# Altium PCB final_sensor_pcb_v3.PcbDoc (part 2 of 3)
Units mm, origin at the board's own origin, x right, y up, seen from the top; angles counter-clockwise.
Board outline 108.2 x 22.22 mm, 2 copper layers (Top Layer, Bottom Layer); 94 components, 57 nets, 253 pads, 98 vias.
Unrouted connection lines stored in the file: 1.
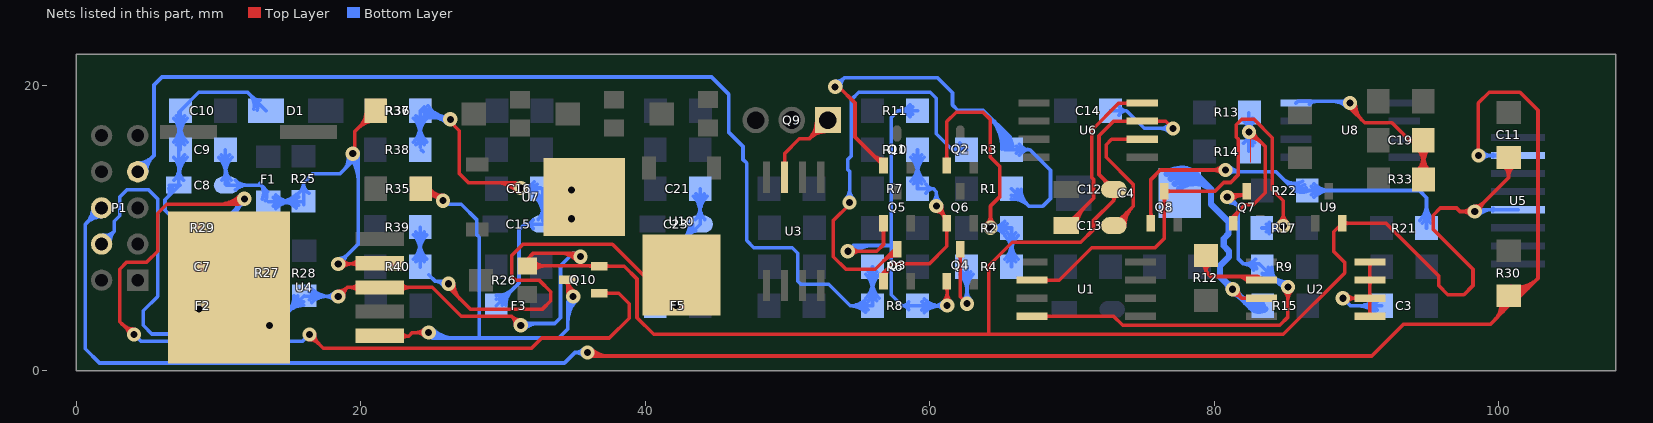
[diagram p2: the nets of this part, all layers, seen from the top]

## Via types
v1: diameter 1, hole 0.5, Top Layer to Bottom Layer, 98 vias

## Nets (pads, with @x,y where several pads share a name; then routed paths per layer and width w, separated by ;. In a path a pad name is that pad's centre, name@x,y a point inside that pad or via, vN(x,y) a via of type N, cw(c..) or ccw(c..) an arc to the next point about the centre after c; other vN are vias at no path point) (continued)
HGND: C7.1 C8.2 C9.1 C10.1 C11.1 C12.1 C14.1 D1.1 F2.2 Q10.2 R26.3 R28.1 R29.1 U4.3 U5.4 U6.3 U9.2 | length 274.9
  Top Layer w0.254: v1(18.415,5.207) 19.05,5.842 ; v1@18.416,5.58 ccw(c18.418,6.474) 19.05,5.842 ; v1@18.788,5.208 cw(c19.682,5.21) 19.05,5.842 ; U4.3@19.872,5.578 ccw(c19.236,4.942) 19.236,5.842 ccw(c19.236,6.742) U4.3@19.872,6.106 ; U4.3@22.8,5.578 cw(c23.436,4.942) 23.436,5.842 cw(c23.436,6.742) U4.3@22.8,6.106 ; v1@30.869,3.176 ccw(c29.975,3.178) 30.607,3.81 ; v1@31.241,3.548 cw(c31.239,4.442) 30.607,3.81 ; v1(31.242,3.175) 31.242,3.302 31.115,3.429 31.115,3.302 30.607,3.81 ; R26.3@31.699,7.35 31.699,7.823 32.131,8.255 35.56,8.255 35.433,8.128 v1(35.433,8.001) ; R26.3@31.75,7.366 Q10.2@36.749,7.35 ; R26.3@32.132,7.014 cw(c32.975,6.166) 32.979,7.362 ; R26.3@32.135,7.683 ccw(c32.906,8.45) 32.903,7.362 ; 33.919,8.255 cw(c33.919,6.487) v1@35.169,7.737 ; 34.533,8.255 cw(c34.533,7.101) v1@35.349,7.917 ; 36.028,7.352 cw(c36.026,6.867) Q10.2@36.37,7.209 ; 36.123,7.352 ccw(c36.124,7.702) Q10.2@36.371,7.454 ; Q10.2@36.768,7.331 38.516,7.331 39.414,6.433 39.414,3.706 40.58,2.54 84.836,2.54 89.154,6.858 89.154,7.596 88.392,8.358 88.392,9.749 U9.2@88.992,10.349 92.057,10.349 95.758,6.648 95.758,5.969 96.393,5.334 97.536,5.334 98.171,5.969 98.171,7.112 95.377,9.906 95.377,10.922 95.877,11.422 97.012,11.422 97.258,11.176 v1(98.298,11.176) 100.686,13.564 ; Q10.2@37.165,7.209 cw(c37.461,6.913) 37.461,7.331 cw(c37.461,7.749) Q10.2@37.165,7.453 ; 64.135,2.54 64.135,7.366 65.786,9.017 70.612,9.017 71.501,9.906 71.501,10.541 72.934,11.974 ; 72.122,13.538 cw(c71.405,12.821) C12.1@72.416,12.742 ; 72.339,13.321 ccw(c72.634,13.616) C12.1@72.634,13.198 ; C12.1@72.73,12.299 cw(c72.575,11.974) 72.934,11.974 ; C12.1@73.139,12.299 ccw(c73.294,11.974) 72.934,11.974 ; U6.3@73.993,17.439 ccw(c73.783,17.229) 73.783,17.526 ccw(c73.783,17.823) U6.3@73.993,17.613 ; U6.3@75.867,17.439 cw(c76.077,17.229) 76.077,17.526 cw(c76.077,17.823) U6.3@75.867,17.613 ; v1(77.089,17.018) 76.581,17.526 U6.3@74.93,17.526 72.898,17.526 71.882,16.51 71.882,13.778 C12.1@72.934,12.725 72.934,11.974 ; 88.669,10.026 cw(c88.981,9.715) U9.2@88.995,10.155 ; U9.2@89.114,10.227 cw(c89.41,9.931) 89.41,10.349 cw(c89.41,10.767) U9.2@89.114,10.471 ; v1@98.034,10.912 ccw(c97.398,10.276) 97.398,11.176 ccw(c97.398,12.076) v1@98.034,11.44 ; v1@98.298,11.549 ccw(c98.298,12.449) 98.935,11.813 ccw(c99.571,11.176) v1@98.671,11.176 ; C11.1@100.262,14.451 cw(c99.545,13.564) 100.686,13.564 ; C11.1@100.422,14.648 cw(c99.975,14.096) 100.686,14.096 cw(c101.396,14.096) C11.1@100.949,14.648 ; C11.1@100.494,14.329 cw(c100.417,14.072) 100.686,14.072 ; C11.1@100.877,14.329 ccw(c100.954,14.072) 100.686,14.072 ; C11.1@101.109,14.451 ccw(c101.827,13.564) 100.686,13.564 ; 19.05,5.842 U4.3@21.336,5.842 25.019,5.842 27.051,3.81 30.607,3.81 ; 100.686,13.564 C11.1@100.686,14.974 100.686,14.072
  Bottom Layer w0.254: 6.407,12.178 ccw(c6.044,12.541) C8.2@6.491,12.794 ; C8.2@6.549,13.026 C8.2@7.203,13.026 ; 6.644,12.415 ccw(c6.346,12.712) C8.2@6.712,12.919 ; C7.1@6.814,6.764 cw(c5.636,5.586) 7.302,5.586 ; C7.1@6.814,7.816 ccw(c5.598,9.031) 7.317,9.031 ; F2.2@6.826,5.073 ccw(c5.677,6.221) 7.302,6.221 ccw(c8.927,6.221) F2.2@7.778,5.073 ; R29.1@6.842,9.507 cw(c5.693,8.358) 7.317,8.358 cw(c8.942,8.358) R29.1@7.793,9.507 ; C9.1@6.842,14.994 cw(c5.968,14.12) 7.203,14.12 ; C8.2@6.869,13.361 ccw(c6.061,14.168) 7.203,14.168 ccw(c8.345,14.168) C8.2@7.538,13.361 ; C7.1@6.994,6.944 cw(c6.249,6.199) 7.302,6.199 ; C7.1@6.994,7.636 ccw(c6.212,8.418) 7.317,8.418 ; F2.2@7.006,4.893 ccw(c6.29,5.608) 7.302,5.608 ccw(c8.313,5.608) F2.2@7.598,4.893 ; R29.1@7.021,9.687 cw(c6.306,8.972) 7.317,8.972 cw(c8.329,8.972) R29.1@7.614,9.687 ; C9.1@7.021,15.866 ccw(c6.306,16.581) 7.317,16.581 ccw(c8.329,16.581) 7.614,15.866 cw(c8.605,16.857) 7.203,16.857 ; C10.1@7.021,17.916 cw(c6.306,17.201) 7.317,17.201 cw(c8.329,17.201) 7.614,17.916 ccw(c8.605,16.925) 7.203,16.925 ; R29.1@7.136,10.033 R29.1@7.317,10.033 ; C8.2@7.183,12.954 6.231,12.002 6.231,11.272 7.317,10.186 R29.1@7.317,10.033 ; C8.2@7.203,13.569 cw(c9.218,13.569) C9.1@7.793,14.994 ; 7.203,14.182 cw(c8.605,14.182) C9.1@7.614,15.173 ; C9.1@7.203,16.312 cw(c9.218,16.312) 7.793,17.737 ccw(c8.942,16.588) 7.317,16.588 ccw(c5.693,16.588) 6.842,17.737 cw(c5.968,16.864) 7.203,16.864 ; 7.203,16.919 cw(c5.968,16.919) 6.842,16.045 ccw(c5.693,17.194) 7.317,17.194 ccw(c8.942,17.194) 7.793,16.045 cw(c9.218,17.47) C10.1@7.203,17.47 ; C7.1@7.29,7.29 7.302,7.278 F2.2@7.302,4.547 ; 7.302,5.644 cw(c8.886,5.644) C7.1@7.766,6.764 ; 7.302,6.257 cw(c8.272,6.257) C7.1@7.586,6.944 ; C8.2@7.311,13.026 C8.2@7.203,13.026 ; C7.1@7.317,7.438 R29.1@7.317,10.033 ; 7.317,8.285 ccw(c8.235,8.285) C7.1@7.586,7.636 ; 7.317,8.898 ccw(c8.848,8.898) C7.1@7.766,7.816 ; C9.1@7.317,15.519 C10.1@7.317,18.263 ; F2.2@7.531,4.318 F2.2@7.302,4.547 ; F2.2@7.865,4.547 cw(c7.865,3.637) v1@8.547,4.239 ; F2.2@7.9,4.238 cw(c8.407,3.975) v1@8.407,4.547 ; F2.2@7.9,4.856 ccw(c8.407,5.118) v1@8.407,4.547 ; v1@8.356,4.071 ccw(c7.302,3.14) F2.2@7.302,4.547 ; v1(8.636,4.318) v1@8.407,4.547 ; 12.167,19.431 cw(c11.351,18.615) D1.1@12.477,18.365 ; 12.384,19.214 ccw(c12.935,19.765) D1.1@12.935,18.986 ; D1.1@12.494,19.104 cw(c11.886,18.496) D1.1@12.725,18.309 ; D1.1@13.335,18.263 12.04,19.558 8.613,19.558 C10.1@7.317,18.263 ; v1(13.589,3.175) 13.945,3.175 R28.1@16.027,5.258 ; v1@13.589,3.294 ccw(c13.589,4.44) 14.399,3.63 ; v1@13.589,3.548 ccw(c13.589,5.307) 14.833,4.063 ; 14.793,4.024 ccw(c13.559,5.258) R28.1@15.304,5.258 ; 14.914,4.144 cw(c15.977,3.081) R28.1@15.977,4.585 ; 15.227,4.457 ccw(c14.426,5.258) R28.1@15.558,5.258 ; R28.1@15.347,4.578 cw(c15.977,3.948) R28.1@15.977,4.839 ; R28.1@16.002,5.207 v1(18.415,5.207) ; R28.1@16.374,4.962 cw(c16.966,4.369) 16.966,5.207 ; R28.1@16.374,5.554 ccw(c17.212,6.392) 17.212,5.207 ; R28.1@16.553,4.782 cw(c17.579,3.756) 17.579,5.207 ; R28.1@16.553,5.734 ccw(c17.825,7.005) 17.825,5.207 ; v1@18.151,4.943 ccw(c17.515,4.307) 17.515,5.207 ccw(c17.515,6.107) v1@18.151,5.471 ; v1(31.242,3.175) 31.242,3.302 33.622,3.302 34.036,3.716 34.036,7.366 34.925,8.255 35.56,8.255 35.433,8.128 v1(35.433,8.001) ; v1@31.326,3.091 cw(c31.836,2.581) 31.836,3.302 cw(c31.836,3.769) v1@31.506,3.439 ; v1@31.506,2.911 cw(c32.449,1.968) 32.449,3.302 ; C14.1@72.695,18.263 73.812,18.263 ; C14.1@73.29,17.948 cw(c73.812,17.671) 73.812,18.263 ; C14.1@73.29,18.577 ccw(c73.812,18.854) 73.812,18.263 ; v1@76.825,16.754 ccw(c76.189,16.118) 76.189,17.018 ccw(c76.189,17.918) v1@76.825,17.282 ; v1(77.089,17.018) 75.057,17.018 73.812,18.263 ; v1@98.298,11.303 U5.4@101.346,11.303 ; v1@98.382,11.092 cw(c98.892,10.582) 98.892,11.303 cw(c98.892,11.77) v1@98.562,11.44 ; v1@98.562,10.912 cw(c99.505,9.969) U5.4@99.505,11.303 ; U5.4@99.604,11.216 ccw(c99.394,11.006) 99.394,11.303 ccw(c99.394,11.6) U5.4@99.604,11.39 ; C8.2@7.203,13.026 7.203,18.148 C10.1@7.317,18.263 ; F2.2@7.302,4.547 v1@8.407,4.547
HMC_E\N\: P1.4 R27.2 | length 37.1
  Bottom Layer w0.254: P1.4@1.778,8.89 2.667,9.779 ; P1.4@1.862,9.507 ccw(c1.99,10.456) 2.667,9.779 ; P1.4@2.395,8.974 cw(c3.344,9.102) 2.667,9.779 ; 5.715,11.049 5.715,5.207 4.699,4.191 4.699,3.175 5.311,2.563 11.58,2.563 13.437,4.42 R27.2@13.437,5.295 ; 5.723,11.062 5.723,12.057 5.08,12.7 3.556,12.7 3.048,12.192 3.048,10.878 2.667,10.497 2.667,9.779 ; 12.043,3.026 ccw(c10.311,4.758) R27.2@12.724,5.179 ; 12.389,3.372 ccw(c10.9,4.86) R27.2@12.974,5.223 ; 12.734,3.717 ccw(c11.488,4.963) R27.2@13.224,5.267 ; 13.08,4.063 ccw(c12.076,5.066) R27.2@13.474,5.311 ; 13.425,4.408 ccw(c12.665,5.169) R27.2@13.724,5.354
IN_RESET: Q7.3 R9.1 U1.4 | length 46.6
  Top Layer w0.254: U1.4@67.183,3.81 68.961,3.81 72.91,3.81 73.545,3.175 82.05,3.175 82.054,3.179 84.586,3.179 85.166,3.759 v1(85.166,5.866) ; U1.4@68.12,3.723 cw(c68.33,3.513) 68.33,3.81 cw(c68.33,4.107) U1.4@68.12,3.897 ; v1@80.518,12.192 80.671,12.345 Q7.3@82.263,12.345 ; v1@80.983,12.108 cw(c81.556,11.535) 81.556,12.345 ; v1@81.163,11.928 cw(c82.169,10.922) Q7.3@82.169,12.345 ; v1@81.163,12.456 ccw(c81.43,12.723) 81.43,12.345 ; 81.795,12.345 cw(c81.795,11.856) Q7.3@82.141,12.202 ; 81.897,12.345 ccw(c81.897,12.691) Q7.3@82.141,12.446 ; v1@84.902,5.602 cw(c84.265,4.965) 85.166,4.965 cw(c86.066,4.965) v1@85.43,5.602
  Bottom Layer w0.254: v1@80.772,12.192 81.026,12.192 81.661,11.557 81.661,7.874 82.042,7.493 ; v1@80.909,11.819 cw(c80.938,10.707) 81.724,11.494 ; v1@81.272,12.192 ccw(c81.866,12.192) 81.446,11.772 ; 82.107,7.493 ccw(c82.107,8.594) R9.1@82.886,7.816 ; 82.448,7.493 cw(c82.448,6.896) R9.1@82.984,7.157 ; R9.1@82.756,7.046 ccw(c82.042,6.7) 82.042,7.493 ; R9.1@83.361,6.567 cw(c83.361,4.821) 84.596,6.055 ; R9.1@83.361,6.821 cw(c83.361,5.688) 84.162,6.489 ; R9.1@83.78,7.24 ccw(c84.671,7.24) R9.1@84.041,6.61 ; R9.1@83.88,6.772 ccw(c85.166,8.058) v1@85.166,6.239 ; R9.1@84.034,7.24 ccw(c85.538,7.24) 84.475,6.176 ; 84.313,6.338 ccw(c85.166,7.191) v1@85.166,5.985 ; v1(85.166,5.866) 85.015,5.715 84.936,5.715 R9.1@83.361,7.29 83.158,7.493 82.042,7.493
  other v1: 80.899,12.192
IN_SET: Q8.3 R17.1 U1.2 | length 42.7
  Top Layer w0.254: U1.2@67.183,6.35 69.088,6.35 71.374,8.636 75.819,8.636 76.485,9.302 Q8.3@76.485,12.599 80.036,12.599 80.653,13.216 81.137,13.216 81.661,13.74 81.661,16.28 81.542,16.399 81.542,17.28 81.915,17.653 82.78,17.653 84.074,16.359 84.074,12.7 84.836,11.938 v1(84.836,10.16) ; U1.2@68.12,6.263 cw(c68.33,6.053) 68.33,6.35 cw(c68.33,6.647) U1.2@68.12,6.437 ; Q8.3@76.363,12.202 cw(c76.067,11.906) 76.485,11.906 cw(c76.903,11.906) Q8.3@76.607,12.202 ; Q8.3@76.607,12.477 cw(c76.903,12.181) 76.903,12.599 cw(c76.903,13.017) Q8.3@76.607,12.721 ; v1@84.572,10.424 ccw(c83.936,11.06) 84.836,11.06 ccw(c85.736,11.06) v1@85.1,10.424
  Bottom Layer w0.254: R17.1@83.324,10.017 v1@84.693,10.017 ; R17.1@83.589,10.017 ccw(c83.589,11.407) v1@84.572,10.424 ; R17.1@83.656,9.761 cw(c84.176,9.36) 84.176,10.017 cw(c84.176,10.673) R17.1@83.656,10.272 ; R17.1@83.857,9.606 cw(c84.693,8.962) v1@84.693,10.017 ; R17.1@83.857,10.427 ccw(c84.693,11.071) v1@84.693,10.017 ; 84.202,10.017 ccw(c84.202,10.794) v1@84.752,10.244 ; 84.282,10.017 cw(c84.282,9.606) v1@84.572,9.896 ; v1(84.836,10.16) v1@84.693,10.017
MICRO_ADC: P1.6 R30.1 U5.7 | length 160.9
  Top Layer w0.254: v1@36.025,1.354 ccw(c36.841,2.17) 36.841,1.016 ; v1@36.068,1.27 36.322,1.016 91.059,1.016 93.281,3.238 99.377,3.238 100.546,4.407 R30.1@100.546,5.118 ; v1@36.205,1.534 ccw(c37.455,2.784) 37.455,1.016 ; v1(98.552,15.113) 98.552,18.796 99.314,19.558 101.473,19.558 102.743,18.288 102.743,6.477 ; 99.758,3.619 ccw(c98.882,4.495) R30.1@100.018,4.99 ; 100.022,3.883 ccw(c99.25,4.655) R30.1@100.251,5.091 ; R30.1@100.127,4.699 R30.1@100.546,5.118 ; 100.286,4.147 ccw(c99.617,4.815) R30.1@100.484,5.192 ; R30.1@100.39,4.631 cw(c100.3,4.402) 100.546,4.402 cw(c100.734,4.402) R30.1@100.713,4.589 ; 100.55,4.411 ccw(c99.985,4.975) R30.1@100.717,5.293 ; R30.1@100.718,5.171 ccw(c100.946,6.276) 101.744,5.478 ; R30.1@100.769,5.419 ccw(c101.06,6.828) 102.077,5.811 ; R30.1@100.82,5.668 ccw(c101.174,7.38) 102.41,6.144 ; R30.1@100.872,5.917 ccw(c101.288,7.932) 102.743,6.477 ; R30.1@100.546,5.118 R30.1@100.686,5.258 101.524,5.258 102.743,6.477
  Bottom Layer w0.254: P1.6@1.155,11.43 cw(c-0.349,11.43) 0.714,10.366 cw(c1.778,9.303) P1.6@1.778,10.807 ; P1.6@1.409,11.43 cw(c0.518,11.43) 1.148,10.8 cw(c1.778,10.17) P1.6@1.778,11.061 ; P1.6@1.778,11.43 0.635,10.287 0.635,1.524 1.628,0.531 34.309,0.531 35.048,1.27 ; v1@35.676,1.008 ccw(c35.048,0.388) 35.048,1.27 ; v1@35.676,1.532 cw(c35.048,2.152) 35.048,1.27 ; v1(35.941,1.27) 35.048,1.27 ; v1(98.552,15.113) U5.7@101.346,15.113 ; v1@98.816,14.849 cw(c99.452,14.213) 99.452,15.113 cw(c99.452,16.013) v1@98.816,15.377 ; U5.7@99.604,15.026 ccw(c99.394,14.816) 99.394,15.113 ccw(c99.394,15.41) U5.7@99.604,15.2
N_CURRENT: P1.7 R6.2 R8.2 | length 89.4
  Bottom Layer w0.254: P1.7@4.318,13.692 P1.7@4.318,13.97 5.461,15.113 5.461,20.066 6.025,20.63 44.648,20.63 45.847,19.431 45.847,16.764 46.863,15.748 46.863,14.835 47.117,14.581 47.117,9.144 47.625,8.636 50.316,8.636 50.711,8.241 50.711,6.282 50.934,6.059 52.893,6.059 54.405,4.547 ; P1.7@4.318,14.339 ccw(c4.318,15.23) 4.948,14.6 ccw(c5.578,13.97) P1.7@4.687,13.97 ; P1.7@4.318,14.593 ccw(c4.318,16.097) 5.382,15.034 ccw(c6.445,13.97) P1.7@4.941,13.97 ; R8.2@55.479,4.084 ccw(c54.406,3.069) 54.406,4.547 ; R8.2@55.479,5.009 cw(c54.406,6.024) 54.406,4.547 ; R8.2@55.492,5.072 ccw(c54.343,6.221) 55.968,6.221 ccw(c57.593,6.221) R8.2@56.444,5.072 ; R6.2@55.492,6.764 cw(c54.343,5.615) 55.968,5.615 cw(c57.593,5.615) R6.2@56.444,6.764 ; R8.2@55.664,4.259 ccw(c54.995,3.627) 54.995,4.547 ccw(c54.995,5.467) R8.2@55.664,4.834 ; R8.2@55.672,4.893 ccw(c54.956,5.608) 55.968,5.608 ccw(c56.98,5.608) R8.2@56.264,4.893 ; R6.2@55.672,6.944 cw(c54.957,6.228) 55.968,6.228 cw(c56.98,6.228) R6.2@56.264,6.944 ; R6.2@55.968,7.29 R8.2@55.968,4.547 54.405,4.547
NetC3_1: C3.1 U2.5 U2.6 U2.7 U2.8 | length 17.5
  Top Layer w0.254: v1(89.027,5.08) U2.6@90.928,5.08 ; v1@89.291,4.816 cw(c89.928,4.179) 89.928,5.08 cw(c89.927,5.98) v1@89.291,5.344 ; U2.6@89.991,4.993 ccw(c89.781,4.783) 89.781,5.08 ccw(c89.781,5.377) U2.6@89.991,5.167 ; U2.5@90.841,3.897 ccw(c90.631,4.107) 90.928,4.107 ccw(c91.225,4.107) U2.5@91.015,3.897 ; U2.6@90.841,4.993 cw(c90.631,4.783) 90.928,4.783 cw(c91.225,4.783) U2.6@91.015,4.993 ; U2.6@90.841,5.167 ccw(c90.631,5.377) 90.928,5.377 ccw(c91.225,5.377) U2.6@91.015,5.167 ; U2.7@90.841,6.263 cw(c90.631,6.053) 90.928,6.053 cw(c91.225,6.053) U2.7@91.015,6.263 ; U2.7@90.841,6.437 ccw(c90.631,6.647) 90.928,6.647 ccw(c91.225,6.647) U2.7@91.015,6.437 ; U2.8@90.841,7.533 cw(c90.631,7.323) 90.928,7.323 cw(c91.225,7.323) U2.8@91.015,7.533 ; U2.5@90.928,3.81 U2.6@90.928,5.08 ; U2.8@90.928,7.62 U2.7@90.928,6.35 U2.6@90.928,5.08
  Bottom Layer w0.254: v1(89.027,5.08) 89.56,4.547 C3.1@91.745,4.547 ; C3.1@91.269,4.071 ccw(c90.12,2.922) 90.12,4.547 ccw(c90.12,6.171) C3.1@91.269,5.022 ; C3.1@91.449,4.25 ccw(c90.733,3.535) 90.733,4.547 ccw(c90.733,5.558) C3.1@91.449,4.843
NetC4_1: C4.1 R15.2 U2.3 | length 33.2
  Top Layer w0.254: v1(81.28,5.715) 81.915,5.08 ; v1@81.281,5.342 cw(c81.283,4.448) 81.915,5.08 ; v1@81.653,5.714 ccw(c82.547,5.712) 81.915,5.08 ; U2.3@82.375,4.993 ccw(c82.165,4.783) 82.165,5.08 ccw(c82.165,5.377) U2.3@82.375,5.167 ; U2.3@83.312,5.08 81.915,5.08
  Bottom Layer w0.254: C4.1@78.823,13.506 C4.1@78.994,13.506
  Bottom Layer w0.45: C4.1@76.64,13.815 cw(c77.658,12.597) C4.1@78.78,13.719 ; C4.1@76.929,13.47 cw(c77.975,12.218) 79.128,13.371 ; C4.1@77.217,13.124 cw(c78.292,11.839) 79.476,13.023 ; C4.1@77.506,12.779 cw(c78.608,11.46) 79.824,12.675 ; C4.1@78.994,13.506 79.756,12.744 79.756,11.684 80.989,10.451 80.989,9.615 80.645,9.271 80.645,8.763 81.026,8.382 81.026,8.001 80.391,7.366 80.391,6.604 v1(81.28,5.715) 82.448,4.547 ; v1@81.005,5.715 ccw(c80.341,5.715) 80.811,6.184 ccw(c81.28,6.654) v1@81.28,5.99 ; v1@81.28,5.44 cw(c81.28,4.776) 81.749,5.246 cw(c82.219,5.715) v1@81.555,5.715 ; 81.781,5.214 ccw(c82.517,5.95) R15.2@83.086,5.078 ; 82.173,4.822 ccw(c82.827,5.476) R15.2@83.332,4.701 ; 82.565,4.43 ccw(c83.136,5.001) R15.2@83.578,4.324 ; R15.2@82.891,4.279 ccw(c82.448,4.046) 82.448,4.547 ; R15.2@82.891,4.814 cw(c82.448,5.047) 82.448,4.547 ; R15.2@83.4,4.547 82.448,4.547
NetC8_1: C8.1 C9.2 F1.1 R25.2 R36.2 U4.4 | length 63.9
  Top Layer w0.254: v1(18.415,7.493) 20.701,7.493 U4.4@20.828,7.62 ; v1@18.679,7.229 cw(c19.315,6.593) 19.315,7.493 cw(c19.315,8.393) v1@18.679,7.757 ; 19.117,7.493 ccw(c19.117,8.561) U4.4@19.872,7.806 ; 19.354,7.493 cw(c19.354,6.76) U4.4@19.872,7.278 ; v1@19.558,15.24 19.558,16.777 R36.2@21.043,18.263 ; 19.809,17.028 cw(c21.043,15.794) R36.2@21.043,17.54 ; 19.93,17.149 ccw(c18.866,18.213) R36.2@20.37,18.213 ; 20.243,17.462 cw(c21.043,16.661) R36.2@21.043,17.794 ; R36.2@20.363,17.583 ccw(c19.733,18.213) R36.2@20.624,18.213
  Bottom Layer w0.254: C9.2@10.004,14.994 cw(c8.856,13.845) 10.48,13.845 cw(c12.105,13.845) C9.2@10.956,14.994 ; C9.2@10.184,15.173 cw(c9.469,14.458) 10.48,14.458 cw(c11.492,14.458) C9.2@10.777,15.173 ; C8.1@10.222,13.361 ccw(c9.597,13.986) 10.48,13.986 ; C8.1@10.48,13.102 C9.2@10.48,15.519 ; 10.48,13.738 ccw(c11.267,13.738) C8.1@10.711,13.181 ; 10.48,14.351 ccw(c11.881,14.351) C8.1@10.89,13.361 ; C8.1@10.556,13.026 13.009,13.026 F1.1@13.462,12.573 ; C8.1@11.19,12.692 cw(c11.998,11.884) 11.998,13.026 cw(c11.998,14.168) C8.1@11.19,13.361 ; 12.889,13.146 cw(c12.22,12.478) F1.1@13.064,12.051 ; 13.137,12.898 cw(c12.549,12.311) F1.1@13.29,11.936 ; F1.1@13.487,11.862 R25.2@15.939,11.862 ; F1.1@13.834,11.566 cw(c14.549,10.85) 14.549,11.862 cw(c14.549,12.873) F1.1@13.834,12.158 ; F1.1@14.013,11.386 cw(c15.162,10.237) 15.162,11.862 cw(c15.162,13.487) F1.1@14.013,12.338 ; F1.1@14.212,11.862 ccw(c14.212,13.614) R25.2@15.451,12.375 ; 14.392,11.862 cw(c14.392,10.365) R25.2@15.451,11.423 ; 14.825,11.862 ccw(c14.825,13.001) R25.2@15.63,12.195 ; 15.005,11.862 cw(c15.005,10.978) R25.2@15.63,11.603 ; R25.2@15.594,12.453 ccw(c15.09,13.183) 15.977,13.183 ; R25.2@15.977,11.659 R25.2@15.977,11.899 15.977,13.183 ; R25.2@16.359,12.453 cw(c16.864,13.183) 15.977,13.183 ; v1(18.415,7.493) 19.812,8.89 v1@19.812,15.367 ; v1@18.415,7.866 ccw(c18.415,8.766) 19.052,8.13 ccw(c19.688,7.493) v1@18.788,7.493 ; 18.796,14.097 ccw(c18.038,14.855) v1@19.071,15.141 ; 19.104,14.405 ccw(c18.521,14.989) v1@19.316,15.208 ; v1@19.167,14.976 cw(c17.611,13.42) 19.812,13.42 ; v1@19.347,15.156 cw(c18.224,14.033) 19.812,14.033 ; 19.413,14.714 ccw(c19.004,15.122) v1@19.561,15.276 ; v1@19.526,15.335 cw(c18.837,14.646) 19.812,14.646 ; v1@19.748,15.05 18.542,13.843 16.637,13.843 15.977,13.183
  other v1: 19.431,15.24
NetC13_1: C13.1 U6.2 | length 13
  Top Layer w0.254: C13.1@72.934,10.185 74.295,11.546 74.295,13.081 72.39,14.986 72.39,15.875 72.771,16.256 U6.2@74.93,16.256 ; C13.1@73.234,10.658 ccw(c73.234,11.076) 73.53,10.781 ; C13.1@73.453,10.185 cw(c74.706,10.185) 73.82,11.071 ; C13.1@73.707,10.185 cw(c75.574,10.185) 74.254,11.505 ; U6.2@73.993,16.169 ccw(c73.783,15.959) 73.783,16.256 ccw(c73.783,16.553) U6.2@73.993,16.343
NetC13_2: C13.2 U6.4 | length 15.1
  Top Layer w0.254: C13.2@69.582,10.185 71.501,12.105 71.501,13.44 71.374,13.567 71.374,16.891 73.279,18.796 U6.4@74.93,18.796 ; C13.2@69.882,10.658 ccw(c69.882,11.076) C13.2@70.177,10.781 ; C13.2@70.101,10.185 cw(c71.354,10.185) 70.468,11.071 ; C13.2@70.355,10.185 cw(c72.221,10.185) 70.901,11.505 ; U6.4@73.993,18.709 ccw(c73.783,18.499) 73.783,18.796 ccw(c73.783,19.093) U6.4@73.993,18.883
NetC15_1: C15.1 C16.2 F3.1 R37.2 R38.2 U7.2 | length 75.4
  Top Layer w0.254: v1(26.289,17.653) 26.289,17.497 26.924,16.862 26.924,13.843 27.559,13.208 30.861,13.208 v1(31.242,12.827) ; 29.422,13.208 cw(c29.422,11.007) v1@30.978,12.563 ; 30.035,13.208 cw(c30.035,11.62) v1@31.158,12.743 ; 30.648,13.208 cw(c30.648,12.233) v1@31.337,12.922
  Bottom Layer w0.254: R38.2@23.693,16.045 ccw(c22.544,17.194) 24.169,17.194 ccw(c25.794,17.194) R38.2@24.645,16.045 ; R37.2@23.693,17.737 cw(c22.544,16.588) 24.169,16.588 cw(c25.794,16.588) R37.2@24.645,17.737 ; R38.2@23.873,15.866 ccw(c23.157,16.581) 24.169,16.581 ccw(c25.18,16.581) R38.2@24.465,15.866 ; R37.2@23.873,17.916 cw(c23.157,17.201) 24.169,17.201 cw(c25.18,17.201) R37.2@24.465,17.916 ; R38.2@24.169,15.709 R37.2@24.169,18.263 24.448,18.542 24.448,17.843 24.511,17.78 26.289,17.78 cw(c26.289,19.693) R37.2@24.721,18.598 ; R38.2@24.257,15.494 R38.2@24.384,15.367 ; R37.2@24.304,18.307 ccw(c25.315,19.013) 25.315,17.78 ; R37.2@24.512,18.452 ccw(c25.802,19.353) 25.802,17.78 ; 25.082,17.78 cw(c25.082,16.446) v1@26.025,17.389 ; v1@26.025,17.917 cw(c25.695,18.247) 25.695,17.78 cw(c25.695,17.059) v1@26.205,17.569 ; F3.1@29.515,4.547 31.115,6.147 31.115,9.906 31.492,10.283 ; F3.1@29.515,5.016 ccw(c29.515,6.148) 30.315,5.347 ; F3.1@29.515,5.27 ccw(c29.515,7.015) 30.749,5.781 ; F3.1@29.934,4.597 cw(c30.825,4.597) F3.1@30.195,5.227 ; F3.1@30.188,4.597 cw(c31.692,4.597) 30.628,5.66 ; v1@31.506,12.563 cw(c32.142,11.927) 32.142,12.827 cw(c32.142,13.727) v1@31.506,13.091 ; 31.794,12.827 cw(c31.794,12.047) C16.2@32.386,12.554 ; 31.795,12.827 ccw(c31.795,13.607) C16.2@32.387,13.099 ; C15.1@32.126,9.983 ccw(c31.492,9.464) 31.492,10.283 ; C15.1@32.126,10.583 cw(c31.492,11.102) 31.492,10.283 ; C16.2@32.193,12.389 ccw(c31.242,11.575) v1(31.242,12.827) ; C16.2@32.194,13.265 cw(c31.242,14.081) v1(31.242,12.827) ; C16.2@32.229,12.25 cw(c30.871,10.892) 32.791,10.892 ; C16.2@32.408,12.43 cw(c31.484,11.506) 32.791,11.506 ; C15.1@32.457,10.617 ccw(c31.649,11.425) 32.791,11.425 ccw(c33.933,11.425) C15.1@33.126,10.617 ; C15.1@32.791,10.283 31.492,10.283 ; 32.791,11.311 cw(c34.12,11.311) C16.2@33.181,12.25 ; 32.791,11.924 cw(c33.507,11.924) C16.2@33.001,12.43 ; C16.2@33.001,12.48 cw(c33.716,11.765) 33.716,12.776 cw(c33.716,13.788) C16.2@33.001,13.073 ; C16.2@33.181,12.3 cw(c34.33,11.152) 34.33,12.776 cw(c34.33,14.401) C16.2@33.181,13.252 ; C15.1@33.25,10.132 cw(c34.205,9.222) 34.205,10.541 ; C15.1@33.434,9.957 cw(c34.798,8.656) 34.798,10.541 32.791,10.541 32.791,12.69 C16.2@32.705,12.776 ; C15.1@33.591,10.541 ccw(c33.591,11.875) v1@34.534,10.932 ; 33.713,12.776 cw(c33.713,11.615) v1@34.534,12.436 ; 34.082,12.776 ccw(c34.082,13.416) v1@34.534,12.964 ; v1@34.534,10.404 ccw(c34.204,10.074) 34.204,10.541 ccw(c34.204,11.262) v1@34.714,10.752 ; v1(34.798,12.7) 34.722,12.776 C16.2@32.705,12.776 ; v1(31.242,12.827) 32.654,12.827 C16.2@32.705,12.776
  other v1: 34.798,10.668
NetC19_2: C19.2 R33.1 U8.8 | length 26.8
  Top Layer w0.254: v1(89.535,18.796) 89.535,18.434 90.558,17.411 92.474,17.411 93.705,16.18 ; v1@89.654,18.792 ccw(c90.714,18.755) 89.964,18.005 ; v1@89.908,18.783 ccw(c91.513,18.728) 90.377,17.592 ; C19.2@94.05,15.942 ccw(c93.705,15.811) 93.705,16.18 ; C19.2@94.05,16.418 cw(c93.705,16.548) 93.705,16.18 ; C19.2@94.203,15.654 cw(c93.054,14.505) 94.679,14.505 ; R33.1@94.215,13.963 ccw(c93.095,15.082) 94.679,15.082 ; C19.2@94.383,15.834 cw(c93.668,15.118) 94.679,15.118 ; R33.1@94.395,13.783 ccw(c93.709,14.469) 94.679,14.469 ; R33.1@94.679,13.449 C19.2@94.679,16.18 93.705,16.18 ; 94.679,14.505 cw(c96.304,14.505) C19.2@95.155,15.654 ; 94.679,14.527 ccw(c95.732,14.527) R33.1@94.987,13.783 ; 94.679,15.118 cw(c95.691,15.118) C19.2@94.975,15.834 ; 94.679,15.14 ccw(c96.345,15.14) R33.1@95.167,13.963
  Bottom Layer w0.254: U8.8@85.729,18.796 85.848,18.915 v1@89.416,18.915 ; U8.8@86.666,18.709 cw(c87.163,18.212) 87.163,18.915 ; 88.347,18.915 cw(c88.347,17.608) v1@89.271,18.532 ; 88.922,18.915 ccw(c88.922,19.409) v1@89.271,19.06 ; 88.96,18.915 cw(c88.96,18.221) v1@89.451,18.712
NetC21_2: C21.2 C23.1 F5.1 R39.2 R40.2 U10.2 | length 78.1
  Top Layer w0.254: v1@26.035,5.969 27.686,4.318 32.766,4.318 33.343,4.895 33.343,5.545 32.557,6.331 30.879,6.331 30.618,6.592 30.618,8.108 31.392,8.882 37.683,8.882 39.851,6.714 U10.2@42.545,6.714 42.545,4.191 v1(42.164,4.572) ; v1@26.281,6.096 ccw(c27.181,6.096) 26.545,5.459 ; v1@26.535,6.096 ccw(c28.049,6.096) 26.978,5.026 ; U10.2@41.9,4.836 ccw(c40.344,6.392) U10.2@42.545,6.392 ; U10.2@42.08,4.656 ccw(c40.957,5.779) U10.2@42.545,5.779 ; U10.2@42.259,4.477 ccw(c41.57,5.166) U10.2@42.545,5.166
  Bottom Layer w0.254: R40.2@23.693,7.816 ccw(c22.544,8.965) 24.169,8.965 ccw(c25.794,8.965) R40.2@24.645,7.816 ; R39.2@23.693,9.554 cw(c22.544,8.405) 24.169,8.405 cw(c25.794,8.405) R39.2@24.645,9.554 ; R40.2@23.873,7.636 ccw(c23.157,8.351) 24.169,8.351 ccw(c25.18,8.351) R40.2@24.465,7.636 ; R39.2@23.873,9.734 cw(c23.157,9.018) 24.169,9.018 cw(c25.18,9.018) R39.2@24.465,9.734 ; R40.2@24.169,7.278 R40.2@24.169,7.29 R39.2@24.169,10.08 ; R40.2@24.765,6.731 25.21,6.286 ; 25.64,6.286 cw(c25.64,5.809) v1@26.058,6.039 ; v1@25.835,5.916 ccw(c25.21,5.573) 25.21,6.286 ; v1(26.162,6.096) 25.972,6.286 25.21,6.286 ; F5.1@40.691,5.016 ccw(c40.691,6.148) 41.491,5.347 ; F5.1@40.691,5.27 ccw(c40.691,7.015) 41.925,5.781 ; F5.1@41.011,4.277 cw(c41.592,3.787) 41.592,4.547 cw(c41.592,5.307) F5.1@41.011,4.817 ; F5.1@41.11,4.597 cw(c42.001,4.597) F5.1@41.371,5.227 ; F5.1@41.202,4.547 ccw(c41.202,5.534) v1@41.9,4.836 ; F5.1@41.205,4.113 cw(c42.139,3.326) v1@42.139,4.547 ; F5.1@41.205,4.981 ccw(c42.139,5.767) v1@42.139,4.547 ; F5.1@41.325,4.547 cw(c41.325,3.733) v1@41.9,4.308 ; F5.1@41.364,4.597 cw(c42.868,4.597) 41.804,5.66 ; v1(42.164,4.572) v1@42.139,4.547 ; 42.568,9 ccw(c41.335,10.233) C23.1@43.079,10.272 ; 42.988,9.42 ccw(c42.156,10.252) C23.1@43.332,10.278 ; 43.256,9.688 cw(c43.551,9.392) C23.1@43.551,9.81 ; C21.2@43.378,12.25 cw(c42.235,11.107) 43.851,11.107 ; C23.1@43.517,10.617 ccw(c42.71,11.425) 43.851,11.425 ccw(c44.993,11.425) C23.1@44.186,10.617 ; C21.2@43.558,12.43 cw(c42.848,11.72) 43.851,11.72 ; 43.851,11.096 cw(c45.484,11.096) C21.2@44.33,12.25 ; 43.851,11.709 cw(c44.871,11.709) C21.2@44.15,12.43 ; C21.2@43.854,12.776 43.851,12.774 C23.1@43.851,10.283 42.418,8.85 42.418,6.274 F5.1@40.691,4.547 v1@42.139,4.547
NetQ1_1: Q1.1 R1.1 R3.1 | length 49.2
  Top Layer w0.254: v1@53.602,19.939 54.737,18.804 54.737,16.415 Q1.1@56.739,14.413 ; 55.974,15.178 ccw(c56.739,15.943) Q1.1@56.739,14.861 ; 56.408,14.744 ccw(c56.739,15.075) Q1.1@56.739,14.607
  Bottom Layer w0.254: v1(53.34,19.939) 53.975,20.574 ; v1@53.341,20.312 ccw(c53.343,21.206) 53.975,20.574 ; v1@53.713,19.94 cw(c54.607,19.942) 53.975,20.574 ; 64.065,17.977 cw(c61.657,15.569) R3.1@65.062,15.569 ; 64.498,17.544 cw(c62.524,15.569) R3.1@65.316,15.569 ; 64.932,17.11 cw(c63.391,15.569) R3.1@65.57,15.569 ; R3.1@65.253,15.519 R3.1@65.659,15.519 ; 65.366,16.676 cw(c64.259,15.569) R3.1@65.824,15.569 ; R1.1@65.735,12.053 cw(c65.735,10.308) 66.969,11.542 ; R1.1@65.735,12.307 cw(c65.735,11.175) 66.536,11.975 ; R1.1@65.735,12.776 66.954,11.557 67.945,11.557 68.473,12.085 68.473,14.077 67.031,15.519 ; R3.1@66.078,15.278 cw(c66.542,14.953) 66.542,15.519 cw(c66.542,16.086) R3.1@66.078,15.76 ; R1.1@66.154,12.726 ccw(c67.045,12.726) R1.1@66.415,12.096 ; R3.1@66.286,15.132 cw(c67.031,14.609) 67.031,15.519 ; R3.1@66.286,15.906 ccw(c67.031,16.43) 67.031,15.519 ; R1.1@66.408,12.726 ccw(c67.912,12.726) 66.849,11.663 ; 53.975,20.574 60.535,20.574 61.585,19.524 61.585,18.669 61.966,18.288 63.754,18.288 65.659,16.383 R3.1@65.659,15.519 ; R3.1@65.659,15.519 R3.1@65.735,15.519 67.031,15.519
NetQ2_1: Q2.1 R2.1 R4.1 | length 35
  Top Layer w0.254: Q2.1@61.062,14.81 ccw(c60.766,15.106) 61.184,15.106 ccw(c61.602,15.106) Q2.1@61.306,14.81 ; Q2.1@61.184,14.413 61.184,17.496 61.849,18.161 63.73,18.161 64.254,17.637 64.254,14.994 64.897,14.351 64.897,12.192 64.262,11.557 v1(64.262,10.033) ; v1@63.998,10.297 ccw(c63.362,10.933) 64.262,10.933 ccw(c65.162,10.933) v1@64.526,10.297
  Bottom Layer w0.254: v1(64.262,10.033) 64.168,10.033 v1@64.151,10.017 ; v1@64.526,9.769 cw(c65.123,9.172) R2.1@65.123,10.017 ; v1@64.526,10.297 ccw(c65.202,10.973) R2.1@65.202,10.017 ; R2.1@65.251,9.549 ccw(c64.151,8.49) v1@64.151,10.017 ; R2.1@65.251,10.484 cw(c64.151,11.543) v1@64.151,10.017 ; R4.1@65.259,7.816 ccw(c64.11,8.965) 65.735,8.965 ccw(c67.36,8.965) R4.1@66.211,7.816 ; R2.1@65.259,9.491 cw(c64.11,8.342) 65.735,8.342 cw(c67.36,8.342) R2.1@66.211,9.491 ; R2.1@65.434,9.726 ccw(c64.749,9.066) 64.749,10.017 ccw(c64.749,10.967) R2.1@65.434,10.307 ; R4.1@65.439,7.636 ccw(c64.724,8.351) 65.735,8.351 ccw(c66.747,8.351) R4.1@66.031,7.636 ; R2.1@65.439,9.67 cw(c64.724,8.955) 65.735,8.955 cw(c66.747,8.955) R2.1@66.031,9.67 ; R4.1@65.735,7.29 R2.1@65.735,10.017 v1@64.151,10.017
NetQ3_1: Q3.1 Q6.1 R7.1 R10.1 | length 29.4
  Top Layer w0.254: Q3.1@56.65,6.708 ccw(c56.554,6.867) 56.739,6.867 ; Q3.1@56.658,6.56 cw(c57.203,6.56) 56.818,6.945 ; Q3.1@56.739,6.285 56.739,6.867 ; Q3.1@56.828,6.708 cw(c56.924,6.867) 56.739,6.867 ; Q3.1@56.912,6.56 cw(c58.07,6.56) 57.251,7.379 ; v1@60.452,11.184 cw(c60.452,10.59) 60.872,11.01 ; v1(60.452,11.557) 60.452,11.303 60.579,11.303 60.706,11.43 60.706,11.176 61.184,10.698 Q6.1@61.184,10.349 61.184,8.733 59.944,7.493 57.365,7.493 56.739,6.867 ; v1@60.824,11.536 ccw(c61.839,11.48) Q6.1@61.12,10.762 ; 60.836,11.046 cw(c60.415,10.624) Q6.1@61.011,10.624 ; Q6.1@61.062,9.952 cw(c60.766,9.656) 61.184,9.656 cw(c61.602,9.656) Q6.1@61.306,9.952
  Bottom Layer w0.254: R7.1@58.655,13.302 ccw(c57.506,14.451) 59.131,14.451 ccw(c60.756,14.451) R7.1@59.607,13.302 ; R10.1@58.655,14.993 cw(c57.506,13.845) 59.131,13.845 cw(c60.756,13.845) R10.1@59.607,14.993 ; R7.1@58.835,13.122 ccw(c58.12,13.838) 59.131,13.838 ccw(c60.143,13.838) R7.1@59.427,13.122 ; R10.1@58.835,15.173 cw(c58.12,14.458) 59.131,14.458 cw(c60.143,14.458) R10.1@59.427,15.173 ; R10.1@59.131,15.519 R7.1@59.131,12.776 60.249,12.776 ; R7.1@59.726,12.461 cw(c60.249,12.185) 60.249,12.776 ; R7.1@59.726,13.091 ccw(c60.249,13.368) 60.249,12.776 ; v1@60.188,11.821 ccw(c59.552,12.457) 60.452,12.457 ccw(c61.352,12.457) v1@60.716,11.821 ; v1@60.452,11.684 60.452,12.573 60.249,12.776
NetQ3_3: Q3.3 R3.2 | length 33.3
  Top Layer w0.254: v1(54.356,11.811) 54.356,11.684 53.213,10.541 53.213,8.001 54.102,7.112 56.152,7.112 57.575,8.535 Q3.3@57.689,8.535 ; 56.73,7.69 cw(c57.689,6.731) Q3.3@57.689,8.087 ; 57.164,8.123 cw(c57.689,7.598) Q3.3@57.689,8.341 ; Q3.3@57.597,8.557 cw(c57.689,8.465) Q3.3@57.689,8.595
  Bottom Layer w0.254: v1@54.092,12.075 ccw(c53.456,12.711) 54.356,12.711 ccw(c55.256,12.711) v1@54.62,12.075 ; v1(54.356,11.811) 54.356,13.994 54.237,14.113 54.237,14.843 54.483,15.089 54.483,19.05 54.991,19.558 60.025,19.558 60.452,19.131 60.452,16.637 61.57,15.519 ; R3.2@61.949,15.265 ccw(c61.57,15.109) 61.57,15.519 ; R3.2@61.949,15.774 cw(c61.57,15.93) 61.57,15.519 ; R3.2@62.103,15.989 R3.2@62.572,15.519 61.57,15.519
NetQ4_1: Q4.1 Q5.1 R8.1 R11.1 | length 45.9
  Top Layer w0.254: v1(54.229,8.382) 56.261,8.382 56.739,8.86 Q5.1@56.739,10.349 Q5.1@56.674,10.414 ; v1@54.493,8.118 cw(c55.129,7.482) 55.129,8.382 cw(c55.129,9.282) v1@54.493,8.646 ; Q5.1@56.617,9.952 cw(c56.321,9.656) 56.739,9.656 cw(c57.157,9.656) Q5.1@56.861,9.952 ; v1@60.95,4.836 ccw(c60.314,5.472) 61.214,5.472 ccw(c62.114,5.472) v1@61.478,4.836 ; Q4.1@61.062,5.888 cw(c60.694,5.52) 61.214,5.52 ; v1(61.214,4.572) Q4.1@61.214,6.255 ; 61.214,5.665 cw(c61.529,5.665) Q4.1@61.306,5.888
  Bottom Layer w0.254: v1@54.134,8.477 cw(c54.878,7.733) 54.878,8.786 ; v1(54.229,8.382) 54.633,8.786 57.173,8.786 57.277,8.89 ; v1@54.313,8.298 cw(c55.491,7.12) 55.491,8.786 ; v1@54.493,8.118 cw(c56.104,6.507) 56.104,8.786 ; R8.1@58.524,4.257 ccw(c58.064,4.038) 58.064,4.547 ; R8.1@58.524,4.836 cw(c58.064,5.055) 58.064,4.547 ; R11.1@58.599,17.851 ccw(c57.76,17.201) 57.76,18.263 ; R11.1@58.599,18.674 cw(c57.76,19.324) 57.76,18.263 ; R11.1@58.8,18.006 ccw(c58.277,17.602) 58.277,18.263 ccw(c58.277,18.923) R11.1@58.8,18.519 ; R11.1@59.131,18.263 57.76,18.263 ; R8.1@59.427,4.25 cw(c60.143,3.535) 60.143,4.547 cw(c60.143,5.558) R8.1@59.427,4.843 ; R8.1@59.607,4.071 cw(c60.756,2.922) 60.756,4.547 cw(c60.756,6.171) R8.1@59.607,5.022 ; 60.252,4.547 ccw(c60.252,5.534) v1@60.95,4.836 ; 60.375,4.547 cw(c60.375,3.733) v1@60.95,4.308 ; v1(61.214,4.572) 61.189,4.547 R8.1@59.131,4.547 58.064,4.547 ; 57.277,8.89 57.277,17.78 57.76,18.263 ; 57.277,8.89 57.277,5.334 58.064,4.547
NetQ4_3: Q4.3 R4.2 | length 12.9
  Top Layer w0.254: Q4.3@62.012,8.138 cw(c61.716,7.842) 62.134,7.842 cw(c62.552,7.842) Q4.3@62.256,8.138 ; Q4.3@62.134,8.535 62.134,5.176 v1(62.611,4.699)
  Bottom Layer w0.254: R4.2@62.096,6.764 cw(c60.854,5.521) 62.611,5.521 ; R4.2@62.276,6.944 cw(c61.467,6.135) 62.611,6.135 ; v1@62.347,4.963 ccw(c61.711,5.599) 62.611,5.599 ccw(c63.511,5.599) v1@62.875,4.963 ; R4.2@62.572,7.29 62.611,7.251 v1(62.611,4.699) ; 62.611,5.709 cw(c64.103,5.709) R4.2@63.048,6.764 ; 62.611,6.322 cw(c63.49,6.322) R4.2@62.868,6.944
NetQ7_1: Q7.1 R13.2 R14.2 | length 23.6
  Top Layer w0: 82.55,14.629 v1@82.55,16.637
  Top Layer w0.254: Q7.1@81.233,10.549 cw(c81.712,10.549) 81.373,10.888 ; Q7.1@81.314,10.38 Q7.1@81.314,10.349 81.314,10.829 82.128,11.643 82.721,11.643 83.566,12.488 83.566,15.748 v1@82.55,16.764 ; Q7.1@81.487,10.549 cw(c82.579,10.549) 81.807,11.322 ; v1@82.423,16.391 cw(c82.423,15.184) 83.277,16.037 ; v1@82.423,16.645 cw(c82.423,16.051) 82.843,16.471 ; v1@82.796,16.764 ccw(c83.39,16.764) 82.97,16.344
  Bottom Layer w0.254: R14.2@82.04,15.968 ccw(c81.404,16.764) v1(82.423,16.764) ; R13.2@82.04,17.56 cw(c81.403,16.764) v1(82.423,16.764) ; v1@82.159,16.5 cw(c81.523,15.864) 82.423,15.864 cw(c83.323,15.864) v1@82.687,16.5 ; v1@82.159,17.028 ccw(c81.523,17.664) 82.423,17.664 ccw(c83.323,17.664) v1@82.687,17.028 ; R14.2@82.423,15.43 v1(82.423,16.764) ; v1@82.423,16.291 ccw(c83.022,16.291) R14.2@82.692,15.792 ; v1@82.423,17.236 cw(c83.023,17.236) R13.2@82.692,17.736 ; R13.2@82.423,18.098 v1(82.423,16.764) ; R14.2@82.832,16.004 cw(c83.335,16.764) v1(82.423,16.764) ; R13.2@82.832,17.524 ccw(c83.335,16.764) v1(82.423,16.764)
NetQ8_1: Q8.1 R21.2 R22.2 | length 43.3
  Top Layer w0.254: Q8.1@75.413,10.746 ccw(c75.117,11.042) 75.535,11.042 ccw(c75.953,11.042) Q8.1@75.657,10.746 ; Q8.1@75.535,10.349 75.535,13.432 76.2,14.097 v1(80.772,14.097) ; v1@80.508,13.833 ccw(c79.872,13.197) 79.872,14.097 ccw(c79.872,14.997) v1@80.508,14.361
  Bottom Layer w0.254: v1(80.772,14.097) 80.899,13.97 84.328,13.97 85.649,12.649 R22.2@86.524,12.649 94.412,12.649 94.908,12.153 R21.2@94.908,10.016 ; v1@80.856,14.181 ccw(c81.366,14.691) 81.366,13.97 ccw(c81.366,13.503) v1@81.036,13.833 ; v1@81.036,14.361 ccw(c81.979,15.304) 81.979,13.97 ; 84.791,13.507 ccw(c85.645,14.361) R22.2@86.21,13.294 ; 85.034,13.264 ccw(c85.813,14.043) R22.2@86.328,13.069 ; 85.277,13.021 ccw(c85.981,13.725) R22.2@86.447,12.845 ; 85.52,12.778 ccw(c86.15,13.407) R22.2@86.566,12.62 ; R22.2@86.821,12.353 cw(c87.536,11.637) 87.536,12.649 cw(c87.536,13.661) R22.2@86.821,12.945 ; R22.2@87,12.173 cw(c88.149,11.024) 88.149,12.649 cw(c88.149,14.274) R22.2@87,13.125 ; R21.2@94.432,10.542 ccw(c93.283,11.691) 94.908,11.691 ccw(c96.533,11.691) R21.2@95.384,10.542 ; R21.2@94.612,10.363 ccw(c93.896,11.078) 94.908,11.078 ccw(c95.919,11.078) R21.2@95.204,10.363
NetQ9_1: Q9.1 U3.7 | length 11.2
  Top Layer w0.254: U3.7@49.697,14.522 ccw(c49.487,14.732) 49.784,14.732 ccw(c50.081,14.732) U3.7@49.871,14.522 ; U3.7@49.784,13.585 49.784,15.24 50.825,16.281 51.505,16.281 52.826,17.602 Q9.1@52.832,17.602 Q9.1@52.705,17.475 ; Q9.1@51.922,16.698 cw(c52.792,15.828) Q9.1@52.82,17.058 ; Q9.1@51.927,16.703 ccw(c51.054,17.575) Q9.1@52.288,17.594 ; Q9.1@52.034,17.59 cw(c50.217,17.563) 51.502,16.278 cw(c52.773,15.007) Q9.1@52.814,16.804
NetQ10_1: Q10.1 R27.1 R29.2 | length 84.8
  Top Layer w0.254: 3.21,3.267 ccw(c4.064,4.12) v1@4.064,2.913 ; 3.517,2.96 cw(c3.097,2.54) v1@3.691,2.54 ; 3.644,2.833 ccw(c4.064,3.253) v1@4.064,2.659 ; v1@4.124,2.353 3.048,3.429 3.048,7.119 3.549,7.62 4.953,7.62 5.715,8.382 5.715,11.049 6.35,11.684 11.43,11.684 v1@11.684,11.938 ; 9.991,11.684 ccw(c9.991,13.885) v1@11.547,12.329 ; 10.604,11.684 ccw(c10.604,13.272) v1@11.727,12.149 ; 11.217,11.684 ccw(c11.217,12.659) v1@11.906,11.97 ; v1@16.383,2.167 cw(c16.383,1.267) 17.02,1.903 cw(c17.656,2.54) v1@16.756,2.54 ; v1(16.383,2.54) 17.362,1.561 31.997,1.561 32.722,2.286 37.465,2.286 38.862,3.683 38.862,4.699 38.13,5.431 Q10.1@36.768,5.431 ; Q10.1@37.165,5.309 cw(c37.461,5.013) 37.461,5.431 cw(c37.461,5.849) Q10.1@37.165,5.553
  Bottom Layer w0.254: v1(4.064,2.54) 4.549,2.055 15.898,2.055 v1(16.383,2.54) ; R29.2@10.48,9.31 cw(c10.48,7.565) 11.715,8.799 ; R29.2@10.48,9.564 cw(c10.48,8.432) 11.281,9.232 ; R29.2@10.48,10.756 ccw(c10.48,11.115) R29.2@10.734,10.861 ; R29.2@10.644,10.102 cw(c11.889,10.244) 11.003,11.13 ; R29.2@10.897,10.131 cw(c12.557,10.321) 11.375,11.502 ; R29.2@10.899,9.983 ccw(c11.79,9.983) R29.2@11.16,9.353 ; 11.084,11.211 ccw(c10.231,12.065) v1@11.438,12.065 ; R29.2@11.149,10.16 cw(c13.225,10.397) 11.747,11.874 10.48,10.607 R29.2@10.48,10.033 12.055,8.458 ; R29.2@11.153,9.983 ccw(c12.657,9.983) 11.594,8.92 ; 11.391,11.518 cw(c11.811,11.098) v1@11.811,11.692 ; 11.518,11.645 ccw(c11.098,12.065) v1@11.692,12.065 ; R27.1@12.845,8.059 ccw(c12.055,7.478) 12.055,8.458 ; R27.1@12.845,8.857 cw(c12.055,9.439) 12.055,8.458 ; R27.1@13.049,8.21 ccw(c12.558,7.848) 12.558,8.458 ccw(c12.558,9.069) R27.1@13.049,8.707 ; R27.1@13.437,8.458 12.055,8.458
  other v1: 11.811,12.065
NetQ10_3: Q10.3 R35.1 U4.1 | length 48.2
  Top Layer w0.254: U4.1@21.463,2.413 23.368,2.413 ; U4.1@22.8,2.178 cw(c23.366,1.612) 23.366,2.413 ; U4.1@22.828,2.674 ccw(c23.368,3.102) 23.368,2.413 ; R35.1@24.189,12.814 cw(c24.371,11.89) 25.036,12.556 ; R35.1@24.238,12.564 cw(c24.481,11.327) v1@25.373,12.219 ; R35.1@24.257,12.7 24.892,12.7 v1@25.717,11.874 ; R35.1@24.287,12.315 cw(c24.592,10.764) v1@25.71,11.882 ; v1@24.501,2.403 ccw(c23.865,1.767) 23.865,2.667 ccw(c23.865,3.567) v1@24.501,2.931 ; v1(24.765,2.667) 23.622,2.667 23.368,2.413 ; R35.1@24.956,12.636 ccw(c25.742,13.423) v1@25.771,12.311 ; 25.234,12.358 cw(c24.814,11.938) v1@25.408,11.938 ; Q10.3@34.396,6.259 cw(c34.026,5.889) 34.549,5.889 ; Q10.3@34.518,6.381 Q10.3@34.549,6.35 ; 34.549,5.575 ccw(c35.085,5.575) v1@34.871,5.083 ; 34.549,5.962 ccw(c35.254,5.962) v1@34.972,5.316 ; 34.549,6.038 cw(c34.861,6.038) Q10.3@34.64,6.259 ; v1(34.925,5.207) 34.798,5.207 34.549,5.456 Q10.3@34.549,6.35 ; v1@35.074,5.549 cw(c35.423,6.35) Q10.3@34.549,6.35
  Bottom Layer w0.254: v1@24.67,2.572 ccw(c25.359,3.261) 25.359,2.286 ; v1@24.765,2.54 25.019,2.286 33.909,2.286 34.544,2.921 34.544,4.826 v1(34.925,5.207) ; v1@24.849,2.751 ccw(c25.972,3.874) 25.972,2.286 ; v1@25.029,2.931 ccw(c26.585,4.487) 26.585,2.286 ; v1@26.162,11.684 27.051,11.684 28.158,10.577 28.158,9.525 28.321,9.362 28.321,2.413 ; 34.544,3.387 cw(c36.745,3.387) v1@35.189,4.943 ; 34.544,4 cw(c36.132,4) v1@35.009,5.123 ; 34.544,4.613 cw(c35.519,4.613) v1@34.83,5.302
  other v1: 25.781,11.938
NetR12_1: R12.1 U2.2 | length 8.4
  Top Layer w0.254: R12.1@79.08,7.497 cw(c78.789,6.96) 79.4,6.96 ; R12.1@79.4,8.089 79.4,6.96 ; R12.1@79.721,7.497 ccw(c80.012,6.96) 79.4,6.96 ; 81.552,6.604 cw(c81.552,5.44) U2.2@82.375,6.263 ; 82.165,6.604 cw(c82.165,6.053) U2.2@82.555,6.443 ; U2.2@83.189,6.35 ccw(c82.892,6.35) 83.102,6.56 ccw(c83.312,6.77) U2.2@83.312,6.473 ; U2.2@83.312,6.35 83.058,6.604 79.756,6.604 79.4,6.96